# Altium PCB PCB_Proyecto_2025-09-27.pcbdoc
Units mm, origin at the board's own origin, x right, y up, seen from the top; angles counter-clockwise.
Board outline 72.88 x 55.65 mm, 2 copper layers (Top Layer, Bottom Layer); 10 components, 4 nets, 26 pads, 0 vias.
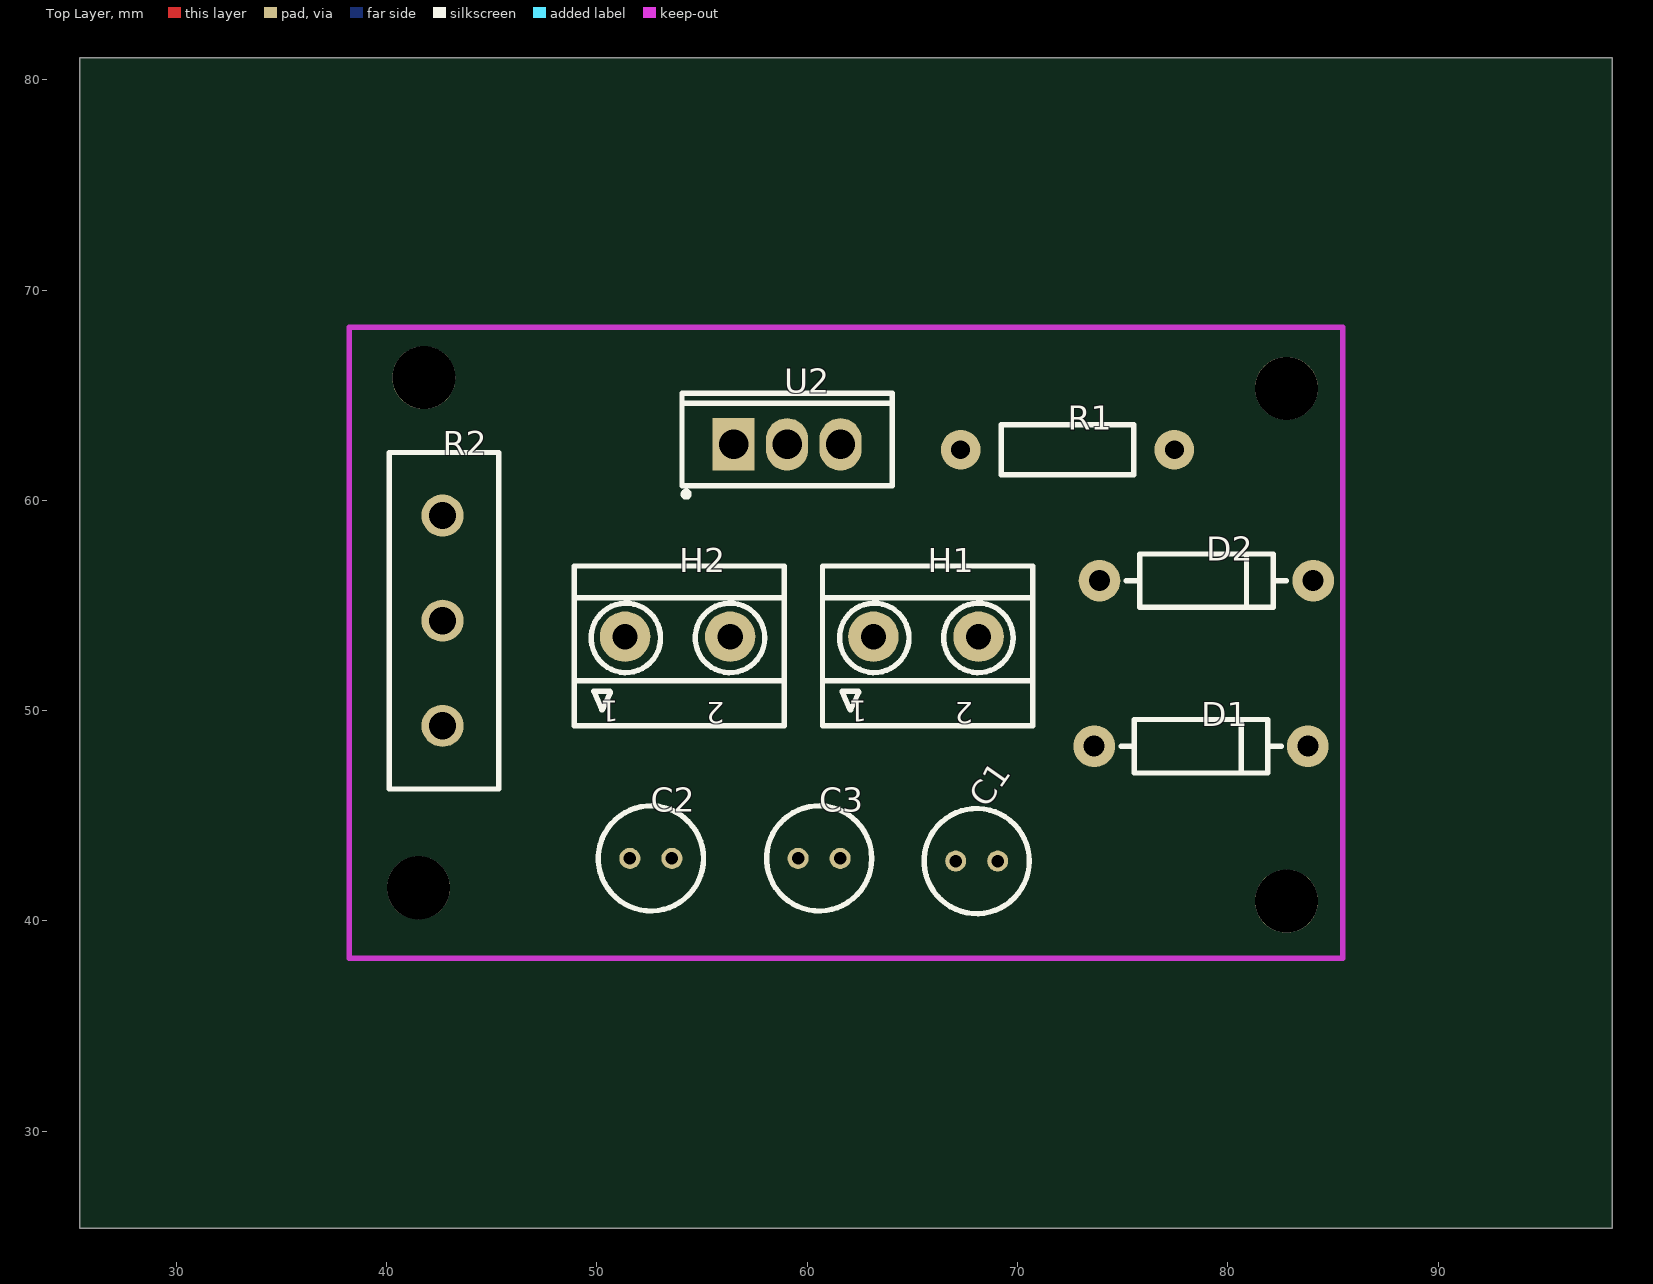
[diagram p0: Top Layer view]
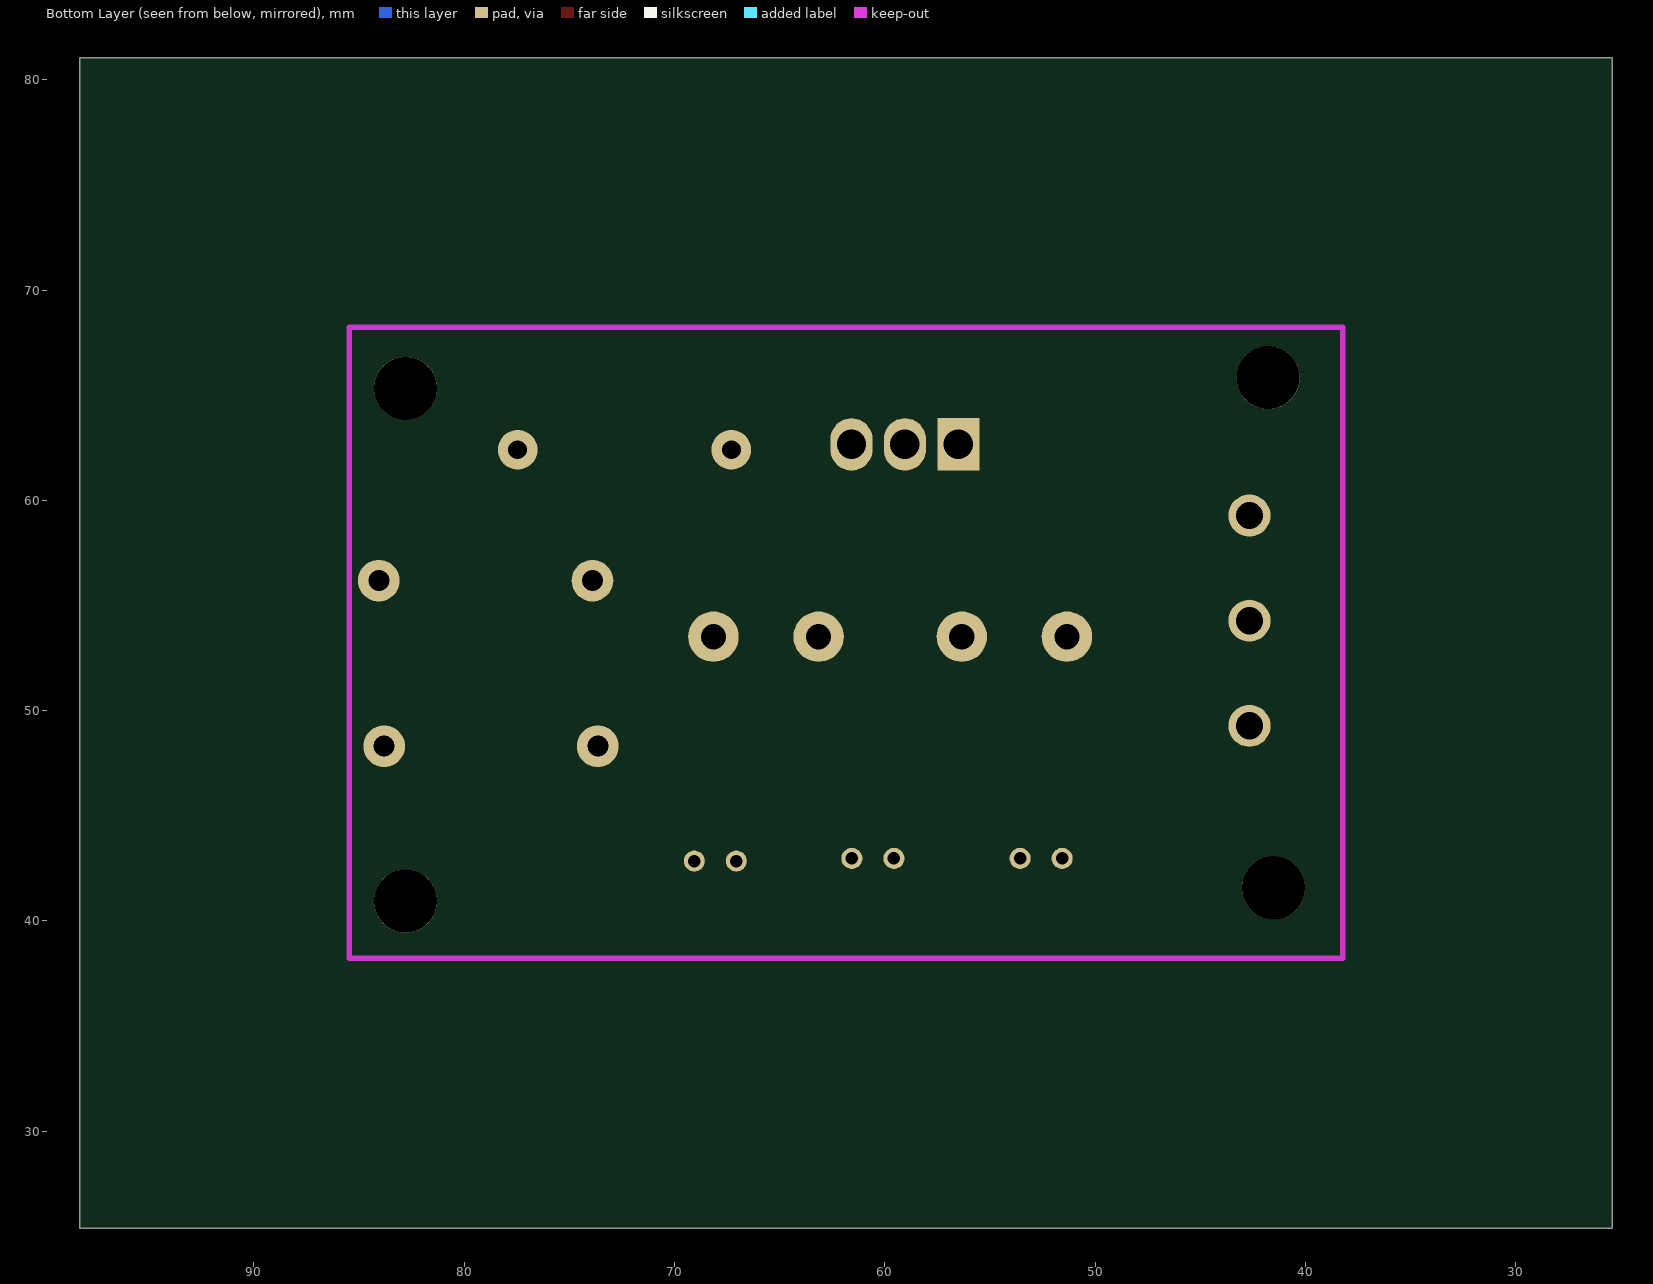
[diagram p1: Bottom Layer view, seen from below]

## Layer stack, top to bottom
Top Layer: signal copper (thickness not stored)
Dielectric: dielectric 0.32, FR-4, Dk 4.8
Bottom Layer: signal copper (thickness not stored)

## Board outline
98.283,25.4 25.4,25.4 25.4,81.054 98.283,81.054

## Components (designator, comment, footprint, x,y, rotation, side; value= is the part's Value field where it differs from the comment)
C1 "0.1µF" CAPD5.0MMXL2.0MM 68.057,42.85 r0 top
C2 "10µF" CAPD5.0MMXL2.0MM 52.563,42.977 r0 top
C3 "1µ F" CAPD5.0MMXL2.0MM 60.564,42.977 r0 top
D1 "1N4001_C478800" DIODE-1N4001 78.725,48.311 r0 top
D2 "1N4001_C478800" DIODE-1N4001 78.979,56.185 r0 top
H1 "HDR-F-2.54_1x2" 2PIN-TERMINALBLOCK-5MM 65.644,53.772 r0 top
H2 "HDR-F-2.54_1x2" 2PIN-TERMINALBLOCK-5MM 53.833,53.772 r0 top
R1 "240" R_AXIAL-0.4 72.375,62.408 r0 top
R2 "5k" POTTYPOTPOT 42.657,54.28 r0 top
U2 "LM317LZ/LFT2" PG-TO220-3_L10.0-W4.4-P2.54-L 59.04,62.662 r0 top

## Footprints (in the part's own frame and the unit in brackets; to place one, negate y for a bottom-side part, rotate by r counter-clockwise, add the part's x,y. Pads: shape width x height; smd on the part's side, far side on the other; paste and mask are expansions set on the pad)
2PIN-TERMINALBLOCK-5MM [mm]
  round 2.4 hole 1.2 paste+0 mask+0.051: 1(-2.5,-0.254) 2(2.5,-0.254)
  silkscreen extent -4.92,-4.49 5.08,3.11
CAPD5.0MMXL2.0MM [mm]
  round 1 hole 0.6 paste+0 mask+0.102: 1(-1,0) 2(1,0)
  silkscreen extent -2.5,-2.5 2.5,2.5
DIODE-1N4001 [mil]
  round 78 hole 39.4 paste+0 mask+2: A(-200,0) C(200,0)
  silkscreen extent -150,-50 150,50
PG-TO220-3_L10.0-W4.4-P2.54-L [mm]
  rect 2x2.5 hole 1.4 paste+0 mask+0.051: 1(-2.54,0)
  oval 2x2.5 hole 1.4 paste+0 mask+0.051: 2(0,0) 3(2.54,0)
  silkscreen extent -5,-2.5 5,2.43
POTTYPOTPOT [mm]
  round 2 hole 1.3 paste+0 mask+0.102: 1(0,-5) 2(0,0) 3(0,5)
  silkscreen extent -2.54,-8 2.67,8
R_AXIAL-0.4 [mil]
  round 74 hole 35.4 paste+0 mask+2: 1(-200,0) 2(200,0)
  silkscreen extent -124,-47 124,47

## Free pads (board coordinates)
  round 3 hole 3 unplated paste+0: ""(41.514,41.58) ""(41.768,65.837) ""(82.789,40.945) ""(82.789,65.329)

## Nets (pads, with @x,y where several pads share a name; then routed paths per layer and width w, separated by ;. In a path a pad name is that pad's centre, name@x,y a point inside that pad or via, vN(x,y) a via of type N, cw(c..) or ccw(c..) an arc to the next point about the centre after c; other vN are vias at no path point)
GND: C1.1 C2.1 C3.1 H1.1 H2.2 R2.2 R2.3
U2_1: C2.2 D2.A R1.1 R2.1 U2.1
U2_2: C3.2 D1.A D2.C H2.1 R1.2 U2.2
U2_3: C1.2 D1.C H1.2 U2.3

## Text inside footprints (layer, text, board x,y; h text height)
H1: Top Overlay "2" at 67.883,50.407 h1 r180; Top Overlay "1" at 62.85,50.462 h1 r180
H2: Top Overlay "2" at 56.072,50.407 h1 r180; Top Overlay "1" at 51.039,50.462 h1 r180